# Altium PCB Main.PcbDoc
Units mm, origin at the board's own origin, x right, y up, seen from the top; angles counter-clockwise.
Board outline 39 x 21.9 mm, 2 copper layers (Top Layer, Bottom Layer); 45 components, 37 nets, 127 pads, 41 vias.
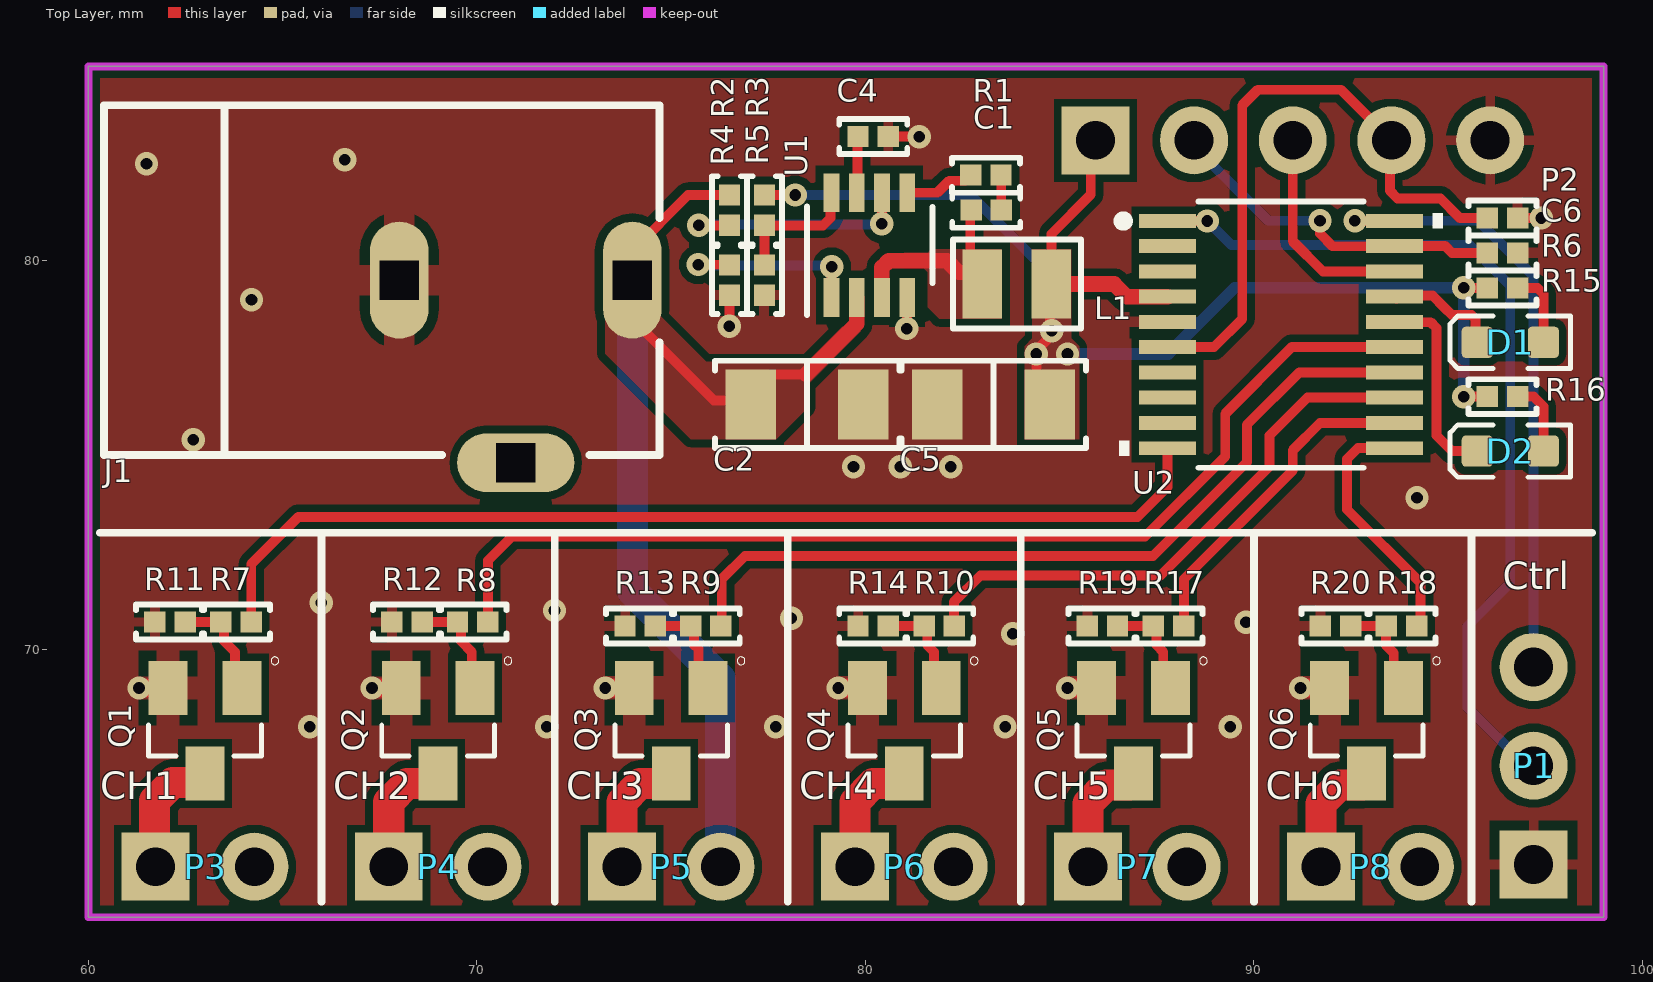
[diagram p0: Top Layer view]
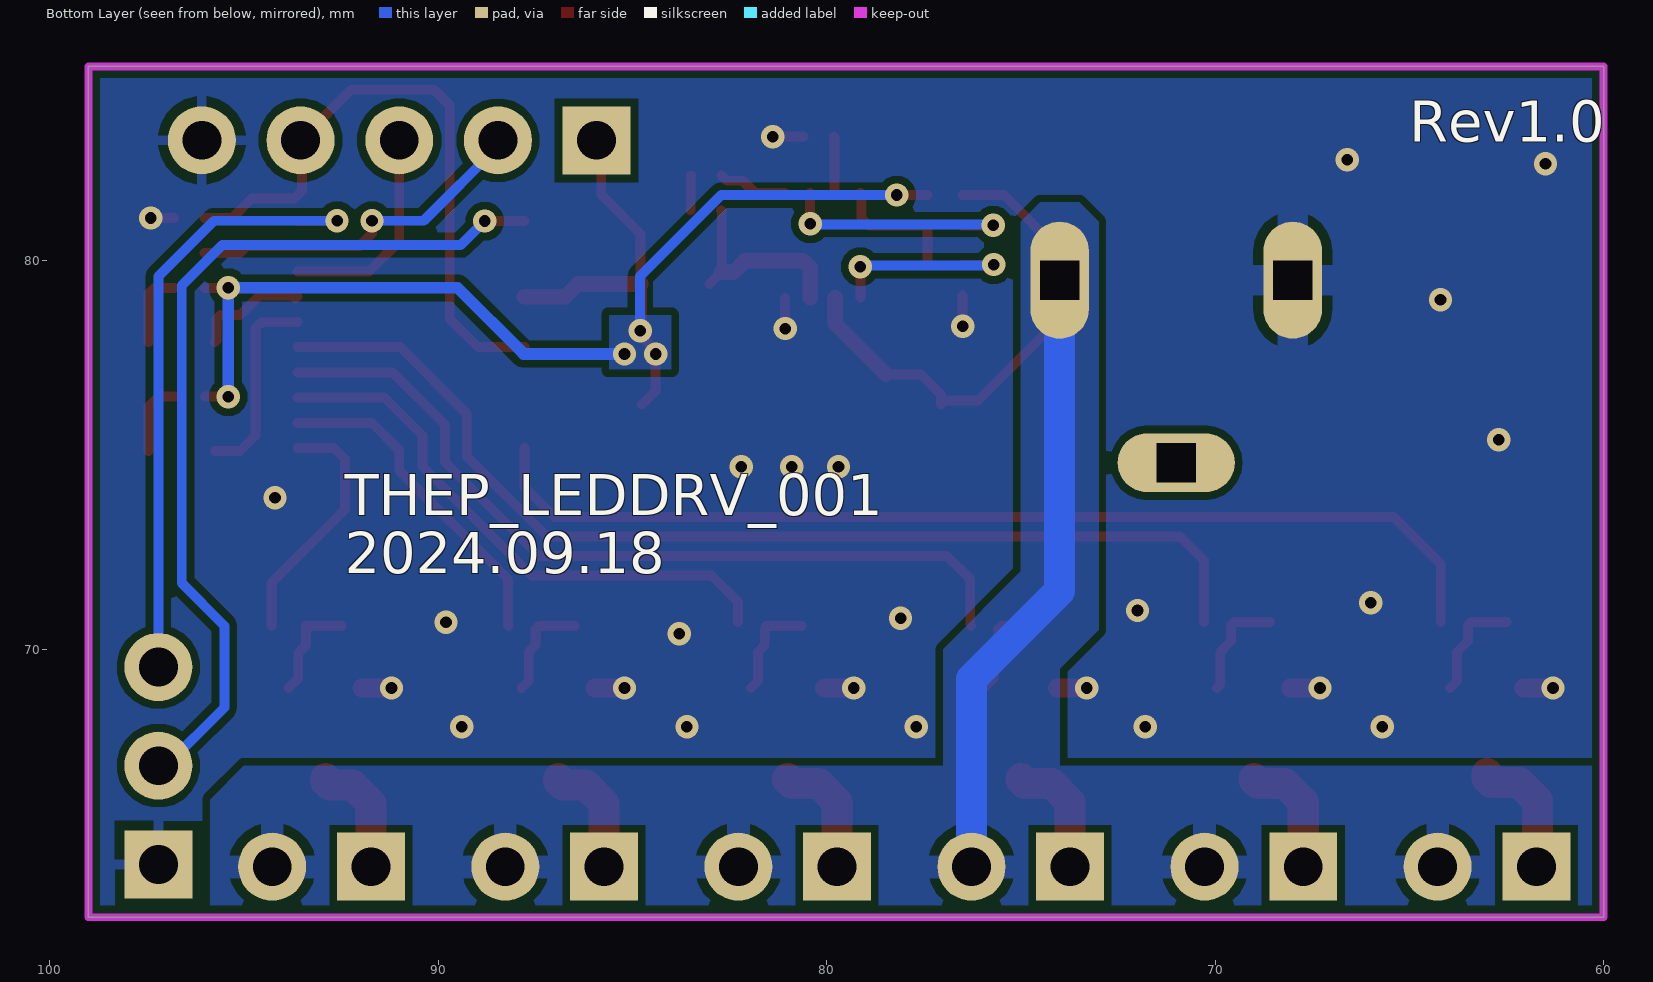
[diagram p1: Bottom Layer view, seen from below]

## Layer stack, top to bottom
Top Solder: solder mask 0.0102, Solder Resist, Dk 3.5
Top Layer: signal copper 0.0356
Dielectric 1: dielectric 0.32, FR-4, Dk 4.8
Bottom Layer: signal copper 0.0356
Bottom Solder: solder mask 0.0102, Solder Resist, Dk 3.5

## Board outline
60,63.1 60,85 99,85 99,63.1

## Design rules (kind name [scope] priority, off if disabled: settings)
Clearance [All] p1: gap=0.2 ignorepadtopadclearanceinfootprint=FALSE
HoleSize [All] p1: absolutevalues=TRUE maxlimit=4 minlimit=0.025 maxpercent=80.000 minpercent=20.000
HoleToHoleClearance [All] p1: gap=0 allowstackedmicrovias=TRUE
MinimumSolderMaskSliver [All] p1: minsoldermaskwidth=0
PolygonConnect [All] p1: connectstyle=Relief reliefconductorwidth=0.254 reliefentries=4 polygonreliefangle="90 Angle" airgapwidth=0.254
RoutingVias [All] p1: holewidth=0.3 width=0.6 viastyle="Through Hole" minholewidth=0.3 minwidth=0.6 maxholewidth=0.5 maxwidth=0.8
SilkToSilkClearance [All] p1 off: silktosilkclearance=0
SilkToSolderMaskClearance [IsPad] p1 off: minsilkscreentomaskgap=0 clearancetoexposedcopper=TRUE
SolderMaskExpansion [All] p1: expansion=0.102 istentingtop=FALSE
Width [All] p1: maxlimit=0.8 minlimit=0.254 preferedwidth=0.3
25 further rules are at their usual default settings.

## Classes and differential pairs
component class Main: C6 D1 D2 P1 P2 R6 R15 R16 U2
component class Power: C1 C2 C4 C5 J1 L1 R1 R2 R3 R4 R5 U1
component class Drivers: P3 P4 P5 P6 P7 P8 Q1 Q2 Q3 Q4 Q5 Q6 R7 R8 R9 R10 R11 R12 R13 R14 R17 R18 R19 R20

## Components (designator, comment, footprint, x,y, rotation, side; value= is the part's Value field where it differs from the comment)
C1 "0.1uF 25V" "CAP 0402_1005" 83.11,81.3 r0 top
C2 "22uF 25V" "CAP 1206_3216" 78.5,76.3 r180 top
C4 "0.1uF 25V" "CAP 0402_1005" 80.2,83.2 r180 top
C5 "22uF 25V" "CAP 1206_3216" 83.3,76.3 r0 top
C6 "0.1uF 25V" "CAP 0402_1005" 96.4,81.1 r180 top
D1 "BLU" LED-0603-BLUE 96.6,77.9 r180 top value=L0603G
D2 "BLU" LED-0603-BLUE 96.6,75.1 r180 top value=L0603G
J1 "PJ-102AH" CUI_PJ-102AH 74,79.5 r180 top
L1 "1uH" IND_SRN2012T_BRN 83.9,79.4 r0 top
P1 "3 Pin Header" "PCB - CONNECTOR - HEADER PIN 03" 97.2,67 r90 top
P2 "5 Pin Header" "PCB - CONNECTOR - HEADER PIN 05" 91,83.1 r0 top locked
P3 "2 Pin Header" "PCB - CONNECTOR - HEADER PIN 02" 63,64.4 r0 top
P4 "2 Pin Header" "PCB - CONNECTOR - HEADER PIN 02" 69,64.4 r0 top
P5 "2 Pin Header" "PCB - CONNECTOR - HEADER PIN 02" 75,64.4 r0 top
P6 "2 Pin Header" "PCB - CONNECTOR - HEADER PIN 02" 81,64.4 r0 top
P7 "2 Pin Header" "PCB - CONNECTOR - HEADER PIN 02" 87,64.4 r0 top
P8 "2 Pin Header" "PCB - CONNECTOR - HEADER PIN 02" 93,64.4 r0 top
Q1 "NDS355AN" SOT95P240X120-3N 63,67.9 r270 top
Q2 "NDS355AN" SOT95P240X120-3N 69,67.9 r270 top
Q3 "NDS355AN" SOT95P240X120-3N 75,67.9 r270 top
Q4 "NDS355AN" SOT95P240X120-3N 81,67.9 r270 top
Q5 "NDS355AN" SOT95P240X120-3N 86.9,67.9 r270 top
Q6 "NDS355AN" SOT95P240X120-3N 92.9,67.9 r270 top
R1 "20R" "RES 0402_1005" 83.1,82.2 r180 top
R2 "100k" "RES 0402_1005" 76.5,81.3 r90 top
R3 "20k" "RES 0402_1005" 77.4,81.3 r90 top
R4 "40.2k" "RES 0402_1005" 76.5,79.5 r90 top
R5 "6.34k" "RES 0402_1005" 77.4,79.5 r90 top
R6 "DNP" "RES 0402_1005" 96.4,80.2 r180 top
R7 "220R 5%" "RES 0402_1005" 63.8,70.7 r180 top
R8 "220R 5%" "RES 0402_1005" 69.89,70.7 r180 top
R9 "220R 5%" "RES 0402_1005" 75.89,70.6 r180 top
R10 "220R 5%" "RES 0402_1005" 81.9,70.6 r180 top
R11 "22k 5%" "RES 0402_1005" 62.1,70.7 r0 top
R12 "22k 5%" "RES 0402_1005" 68.2,70.7 r0 top
R13 "22k 5%" "RES 0402_1005" 74.2,70.6 r0 top
R14 "22k 5%" "RES 0402_1005" 80.2,70.6 r0 top
R15 "500R" "RES 0402_1005" 96.4,79.3 r0 top
R16 "500R" "RES 0402_1005" 96.4,76.5 r0 top
R17 "220R 5%" "RES 0402_1005" 87.8,70.6 r180 top
R18 "220R 5%" "RES 0402_1005" 93.8,70.6 r180 top
R19 "22k 5%" "RES 0402_1005" 86.1,70.6 r0 top
R20 "22k 5%" "RES 0402_1005" 92.1,70.6 r0 top
U1 "MP2318GJ-P" TSOT23-8_MP2318_MNP 80.1,80.4 r90 top
U2 "STM32G030F6P6" "STM32 - TSSOP20" 90.7,78.1 r0 top locked

## Footprints (in the part's own frame and the unit in brackets; to place one, negate y for a bottom-side part, rotate by r counter-clockwise, add the part's x,y. Pads: shape width x height; smd on the part's side, far side on the other; paste and mask are expansions set on the pad)
"CAP 0402_1005" [mm] "Chip Capacitor, 2-Leads, Body 1.02x0.51mm, IPC High Density"
  rect 0.55x0.54 smd: 1(-0.39,0) 2(0.39,0)
  silkscreen extent -0.87,-0.45 0.87,0.45, body extent -0.5,-0.26 0.5,0.26, height 0.52
"CAP 1206_3216" [mm] "Chip Capacitor, 2-Leads, Body 3.25x1.60mm, IPC Medium Density"
  rect 1.3x1.8 smd: 1(-1.45,0) 2(1.45,0)
  silkscreen extent -2.37,-1.12 2.37,1.12, body extent -1.6,-0.81 1.6,0.81, height 1.62
CUI_PJ-102AH [mm]
  oval 1.508x3.016 hole 1 square: 1(0,0) 2(6,0)
  oval 3.016x1.508 hole 1 square: 3(3,4.7)
  silkscreen extent -0.7,-4.5 13.6,4.5, body extent -0.8,-4.6 13.6,4.8, height 11.1
IND_SRN2012T_BRN [mil]
  rect 40x70 smd paste+0 mask+0: 1(-35,0) 2(35,0)
  silkscreen extent -65,-45 65,45, body extent -44,-28 44,28, height 47
LED-0603-BLUE [mm]
  round 0.254 on Mech15: 0(0,0)
  rrect25% 0.8x0.8 smd: A(-0.85,0) K(0.85,0)
  Top Layer pour cut-out: -0.5,0.5 0.5,0.5 0.5,-0.5 -0.5,-0.5
  silkscreen extent -1.55,-0.67 1.55,0.67, body extent -0.8,-0.4 0.8,0.4, height 0.75
"PCB - CONNECTOR - HEADER PIN 02" [mm]
  rect 1.75x1.75 hole 1: 1(-1.27,0)
  round 1.75 hole 1: 2(1.27,0)
"PCB - CONNECTOR - HEADER PIN 03" [mm]
  rect 1.75x1.75 hole 1: 1(-2.54,0)
  round 1.75 hole 1: 2(0,0) 3(2.54,0)
"PCB - CONNECTOR - HEADER PIN 05" [mm]
  rect 1.75x1.75 hole 1: 1(-5.08,0)
  round 1.75 hole 1: 2(-2.54,0) 3(0,0) 4(2.54,0) 5(5.08,0)
"RES 0402_1005" [mm] "Chip Resistor, 2-Leads, Body 1.0x0.5mm, IPC High Density"
  rect 0.55x0.54 smd: 1(-0.39,0) 2(0.39,0)
  silkscreen extent -0.87,-0.45 0.87,0.45, body extent -0.5,-0.25 0.5,0.25, height 0.35
SOT95P240X120-3N [mm]
  rect 1.4x1 smd: 1(-1.1,0.95) 2(-1.1,-0.95) 3(1.1,0)
  silkscreen extent -1.9,-1.45 0.65,1.9, body extent -1.25,-1.46 1.25,1.46, height 1.12
"STM32 - TSSOP20" [mm]
  rect 1.462x0.355 smd paste+0 mask+0: 1(-2.921,2.925) 2(-2.921,2.275) 3(-2.921,1.625) 4(-2.921,0.975) 5(-2.921,0.325) 6(-2.921,-0.325) 7(-2.921,-0.975) 8(-2.921,-1.625) 9(-2.921,-2.275) 10(-2.921,-2.925) 11(2.921,-2.925) 12(2.921,-2.275) 13(2.921,-1.625) 14(2.921,-0.975) 15(2.921,-0.325) 16(2.921,0.325) 17(2.921,0.975) 18(2.921,1.625) 19(2.921,2.275) 20(2.921,2.925)
  silkscreen extent -4.19,-3.43 4.16,3.43, body extent -3.3,-3.3 3.3,3.3, height 1.2
TSOT23-8_MP2318_MNP [mm]
  rect 0.998x0.406 smd paste+0 mask+0: 1(-1.35,0.975) 2(-1.35,0.325) 3(-1.35,-0.325) 4(-1.35,-0.975) 5(1.35,-0.975) 6(1.35,-0.325) 7(1.35,0.325) 8(1.35,0.975)
  silkscreen extent -1.8,-1.63 1,1.6, body extent -1.5,-1.5 1.5,1.5, height 0.99

## Part data
C1 C2 C4 C5 C6: library part Capacitor, "SMT Capacitor"
D1 D2: library part LED_BLUE, "CHIP LED BLUE", Manufacturer=Multicomp, Manufacturer Part Number="LG L29K-G2J1-24-Z", Part Number="LG L29K Smartled Green", Supplier part number=475-2709-1-ND, Artikkelnr Noca=N.A., Artikkelnr Simpro=N.A., Datasheet=http://www.osram-os.com/Graphics/XPic2/00077107_0.pdf, Footprint Doc=0603, LatestRevisionDate=2014-10-28, Note="2,24..5.6 mcd, Vfmin=1.7V", Pin Count=2, Published=2014-10-28, Publisher="Nordic Semiconductor", Supplier=Digi-Key
J1: "2.0 mm Center Pin, 5.0 A, Right Angle, Through Hole, Tapered Pins, Dc Power Jack Connector, Barrel Jack", Full Part Number=PJ-102AH
L1: library part "Inductor Core", "SMD Inductor with Core", Full Part Number=LQM2MPN1R0MGHL
Q1 Q2 Q3 Q4 Q5 Q6: "N-CHANNEL ENHANCEMENT MODE MOSFET", Full Part Number=NDS355AN
R1 R2 R3 R4 R5 R6 R7 R8 R9 R10 R11 R12 R13 R14 R15 R16 R17 R18 R19 R20: library part Resistor, "SMT Resistor"
U1: "No Description Available", Full Part Number=MP2318GJ, Mfr_Name="Monolithic Power Systems", RefDes=RefDes, Type=Type
U2: "No Description Available", Full Part Number=STM32G030F6P6

## Via types
v1: diameter 0.6, hole 0.3, Top Layer to Bottom Layer, tented both sides, 41 vias

## Nets (pads, with @x,y where several pads share a name; then routed paths per layer and width w, separated by ;. In a path a pad name is that pad's centre, name@x,y a point inside that pad or via, vN(x,y) a via of type N, cw(c..) or ccw(c..) an arc to the next point about the centre after c; other vN are vias at no path point)
3V3: C5.2 L1.2 P2.1 R3.2 R15.1 R16.1 U2.4 | length 35.3
  Top Layer w0.254: R3.2 v1(78.19,81.69) ; C5.2 84.4,76.65 84.4,77.694 84.75,78.044 84.75,79.361 L1.2 84.789,80.689 85.8,81.7 85.8,82.98 P2.1 ; v1(95.4,76.5) R16.1@96.005,76.5 ; v1(95.405,79.3) R15.1
  Top Layer w0.4: L1.2 86.4,79.4 86.725,79.075 U2.4
  Bottom Layer w0.254: v1(78.19,81.69) 82.71,81.69 84.8,79.6 v1(84.8,78.2) ; v1(95.4,76.5) v1@95.402,76.502 ; v1@95.402,79.297 v1(95.405,79.3)
  Bottom Layer w0.3: v1(85.2,77.6) 87.8,77.6 89.5,79.3 v1(95.405,79.3) ; v1@95.402,76.502 v1@95.402,79.297
  other v1: 84.4,77.6
12V: C2.2 J1.1 P3.2 P4.2 P5.2 P6.2 P7.2 P8.2 R2.2 U1.2 | length 29.3
  Top Layer w0.254: R2.2 75.436,81.69 74,80.254 J1.1 74,78.5 76.1,76.4 76.95,76.4 C2.2 77.05,76.55 77.573,77.073 78.473,77.073
  Top Layer w0.4: 78.473,77.073 79.772,78.372 79.772,79.047 U1.2
  Bottom Layer w0.8: J1.1 74,71.5 76.27,69.23 P5.2
GATE1: R7.1 U2.10 | length 26.9
  Top Layer w0.254: R7.1 64.19,72.19 65.4,73.4 87,73.4 87.779,74.179 U2.10
GATE2: R8.1 U2.15 | length 27.8
  Top Layer w0.254: R8.1 70.28,72.28 70.9,72.9 87.2,72.9 89.262,74.962 89.262,76.062 90.975,77.775 U2.15
GATE3: R9.1 U2.14 | length 21.3
  Top Layer w0.254: R9.1 76.3,70.62 76.3,71.8 76.9,72.4 87.4,72.4 89.821,74.821 89.821,75.779 91.167,77.125 U2.14
GATE4: R10.1 U2.13 | length 14.5
  Top Layer w0.254: R10.1@82.28,70.7 82.28,71.22 82.96,71.9 87.6,71.9 90.4,74.7 90.4,75.5 91.375,76.475 U2.13
GATE5: R17.1 U2.12 | length 8.6
  Top Layer w0.254: R17.1 88.202,70.612 88.202,71.802 91,74.6 91,75.119 91.706,75.825 U2.12
GATE6: R18.1 U2.11 | length 6.4
  Top Layer w0.254: U2.11 92.675,75.175 92.4,74.9 92.4,73.6 94.29,71.71 R18.1@94.29,70.6
GND: C2.1 C4.1 C5.1 C6.1 J1.2 P1.1 P2.5 Q1.2 Q2.2 Q3.2 Q4.2 Q5.2 Q6.2 R4.1 R5.1 R6.1 R11.1 R12.1 R13.1 R14.1 R19.1 R20.1 U1.4 U2.5 | length 7.5
  Top Layer w0.254: v1@76.498,78.318 R4.1@76.498,79.108 ; C4.1@80.592,83.198 v1@81.382,83.198 ; v1@81.072,78.258 U1.4@81.072,79.048 ; C6.1 v1(97.395,81.1)
  Top Layer w0.5: v1(61.3,69) Q1.2 ; v1(67.3,69) Q2.2 ; v1(73.3,69) Q3.2 ; v1(79.3,69) Q4.2 ; v1(85.2,69) Q5.2 ; v1(91.2,69) Q6.2
  other v1: 65.695,68 71.795,68 77.695,68 83.595,68 89.395,68 83.795,70.395 89.795,70.695 78.095,70.795 71.995,70.995 65.995,71.195 94.2,73.9 79.695,74.695 80.895,74.695 82.195,74.695 62.695,75.395 81.068,78.253 76.493,78.313 64.195,78.995 61.495,82.495 66.595,82.595 81.387,83.193
NetC1_1: C1.1 L1.1 U1.3 | length 5.3
  Top Layer w0.254: C1.1 82.7,81.28 82.7,79.711 82.711,79.7 L1.1
  Top Layer w0.4: U1.3 80.425,79.825 80.6,80 82.1,80 82.4,79.7 L1.1@82.711,79.7
NetC1_2: C1.2 R1.1 | length 0.9
  Top Layer w0.254: R1.1 83.495,82.195 83.495,81.305 C1.2
NetC4_2: C4.2 U1.7 | length 1.5
  Top Layer w0.254: U1.7 79.792,81.767 79.792,83.183 C4.2
NetD1_A: D1.A R15.2 | length 2
  Top Layer w0.254: R15.2 97.3,79.3 97.45,79.15 D1.A
NetD1_K: D1.K U2.17 | length 3
  Top Layer w0.254: U2.17@93.671,79.025 U2.17 93.646,79.1 94.6,79.1 94.9,78.8 95.1,78.6 95.6,78.6 95.7,78.5 95.7,77.95 D1.K
NetD2_A: D2.A R16.2 | length 1.9
  Top Layer w0.254: R16.2 97.2,76.5 97.45,76.25 D2.A
NetD2_K: D2.K U2.16 | length 5.1
  Top Layer w0.254: U2.16 93.63,78.416 94.551,78.416 94.7,78.267 94.7,75.5 95.1,75.1 D2.K
NetP3_1: P3.1 Q1.3 | length 3.4
  Top Layer w0.8: P3.1 61.7,64.43 61.7,66.1 62.169,66.569 62.9,66.569 63,66.669 Q1.3
NetP4_1: P4.1 Q2.3 | length 3.2
  Top Layer w0.8: P4.1 67.73,66.07 68.199,66.539 68.9,66.539 69,66.639 Q2.3@69,66.669
NetP5_1: P5.1 Q3.3 | length 3.2
  Top Layer w0.8: P5.1 73.73,66.07 74.199,66.539 74.9,66.539 75,66.639 Q3.3@75,66.669
NetP6_1: P6.1 Q4.3 | length 3.2
  Top Layer w0.8: P6.1 79.73,66.07 80.199,66.539 80.9,66.539 81,66.639 Q4.3@81,66.669
NetP7_1: P7.1 Q5.3 | length 3.1
  Top Layer w0.8: P7.1 85.73,66.031 86.199,66.5 86.8,66.5 86.9,66.6 Q5.3@86.9,66.669
NetP8_1: P8.1 Q6.3 | length 3.1
  Top Layer w0.8: P8.1 91.73,66.031 92.199,66.5 92.8,66.5 92.9,66.6 Q6.3@92.9,66.669
NetQ1_1: Q1.1 R7.2 R11.2 | length 2.8
  Top Layer w0.254: R11.2 R7.2 63.493,70.617 63.493,70.207 63.768,69.932 63.768,69.182 Q1.1
NetQ2_1: Q2.1 R8.2 R12.2 | length 2.8
  Top Layer w0.254: R12.2 R8.2 69.588,70.612 69.588,70.212 69.868,69.932 69.868,69.082 Q2.1
NetQ3_1: Q3.1 R9.2 R13.2 | length 2.7
  Top Layer w0.254: R13.2 R9.2 75.588,70.512 75.588,70.112 75.7,70 75.7,69.25 Q3.1
NetQ4_1: Q4.1 R10.2 R14.2 | length 2.6
  Top Layer w0.254: R14.2@80.645,70.6 R10.2@81.555,70.6 ; R10.2@81.55,70.55 81.593,70.507 81.593,70.107 81.768,69.932 81.768,69.182 Q4.1
NetQ5_1: Q5.1 R17.2 R19.2 | length 2.7
  Top Layer w0.254: R19.2 R17.2 87.493,70.517 87.493,70.107 87.668,69.932 87.668,69.182 Q5.1
NetQ6_1: Q6.1 R18.2 R20.2 | length 2.7
  Top Layer w0.254: R20.2 R18.2 93.4,70.59 93.4,70.1 93.6,69.9 93.6,69.25 Q6.1
NetR1_2: R1.2 U1.5 | length 1.8
  Top Layer w0.254: U1.5 81.85,81.75 82.157,82.057 82.567,82.057 R1.2
NetR2_1: R2.1 U1.6 | length 6.3
  Top Layer w0.254: v1(75.71,80.91) R2.1 ; v1@80.423,80.957 U1.6@80.423,81.747
  Bottom Layer w0.254: v1(75.71,80.91) 75.731,80.931 80.396,80.931 v1(80.418,80.952)
NetR3_1: R3.1 R5.2 U1.8 | length 3.5
  Top Layer w0.254: R5.2 R3.1 78.91,80.91 79.1,81.1 79.1,81.725 U1.8
NetR4_2: R4.2 U1.1 | length 5
  Top Layer w0.254: v1(75.7,79.9) 75.705,79.895 76.495,79.895 R4.2 ; U1.1 v1@79.125,79.84
  Bottom Layer w0.254: v1(75.7,79.9) 75.727,79.873 79.103,79.873 v1(79.13,79.845)
NRST: C6.2 P2.4 U2.6 | length 16.4
  Top Layer w0.254: U2.6 88.975,77.775 89.7,78.5 89.7,84 90.1,84.4 92.24,84.4 P2.4 93.5,83.06 93.5,81.8 93.7,81.6 94.8,81.6 95.3,81.1 C6.2
SWCLK: P2.2 R6.2 U2.19 | length 9.3
  Top Layer w0.254: P2.2 P2.2@88.46,83.26 ; v1@91.766,80.934 91.7,81 91.7,80.7 92.027,80.373 93.619,80.373 U2.19 94.925,80.375 95.1,80.2 R6.2
  Bottom Layer w0.254: P2.2 88.46,82.94 90.37,81.03 v1(91.7,81.03)
SWDIO: P2.3 U2.18 | length 5.5
  Top Layer w0.254: P2.3 91,80.5 91.775,79.725 U2.18
USART1_RX: P1.2 U2.1 | length 22.9
  Top Layer w0.254: U2.1 v1@88.8,81.025
  Bottom Layer w0.254: v1(88.8,81.02) 89.417,80.403 95.555,80.403 96.6,79.358 96.6,71.7 95.5,70.6 95.5,68.5 P1.2@97,67
USART1_TX: P1.3 U2.20 | length 16.3
  Top Layer w0.254: v1@92.6,81.025 U2.20
  Bottom Layer w0.254: v1(92.6,81.03) 95.77,81.03 97.2,79.6 P1.3
pads on no net: D1.0 D2.0 J1.3 U2.2 U2.3 U2.7 U2.8 U2.9

## Polygon pours and split planes (outlines as drawn)
GND on Top Layer "NONET_L01_P-001" (solid, pour order 16): 60,85 99,85 99,63.1 60,63.1
3V3 on Top Layer "NONET_L01_P-001" (solid, pour order 14): 84.1,75.4 84.1,77.8 84.3,78 84.3,80.3 85.3,80.3 85.3,78 85.5,77.8 85.5,75.4
NetC1_1 on Top Layer "NONET_L01_P-001" (solid, pour order 13): 81,79.8 81.5,79.8 81.6,79.7 81.6,78.8 81.9,78.5 83.5,78.5 83.5,80.3 81.7,80.3 81.6,80.2 81,80.2
12V on Top Layer "NONET_L01_P-001" (solid, pour order 15): 73.3,77.6 75.5,75.4 77.7,75.4 78.5,76.2 78.5,76.8 80,78.3 80,79.6 79.6,79.6 79.6,78.5 78.5,77.4 75.9,77.4 74.7,78.6 74.7,80.4 73.3,80.4
GND on Bottom Layer "NONET_L01_P-001" (solid, pour order 20): 60,85 99,85 99,63.1 60,63.1
12V on Bottom Layer "NONET_L01_P-001" (solid, pour order 18): 73,81 73,70.5 74,69.5 74,66.5 77,66.5 77,70 75,72 75,81 74.5,81.5 73.5,81.5 73,81
12V on Bottom Layer "NONET_L01_P-001" (solid, pour order 19): 60,63.1 60,67 95,67 95.871,66.129 95.871,63.1
3V3 on Bottom Layer "NONET_L01_P-001" (solid, pour order 17): 84,78.6 84,77.2 85.6,77.2 85.6,78.6

## Keep-outs
Keep-Out Layer:
  the board outline again, w0.2

## Silkscreen, mask and mechanical layers (free items; w line width, h text height)
Top Overlay:
  lines w0.2: 60.3,73 66,73 ; 66,63.5 66,73 ; 72,63.5 72,73 ; 78,63.5 78,73 ; 84,63.5 84,73 ; 90,63.5 90,73 ; 95.6,63.5 95.6,73 ; 98.7,73 95.6,73 ; 66,73 72,73 ; 72,73 78,73 ; 78,73 84,73 ; 84,73 90,73 ; 90,73 95.6,73
  text "Ctrl" at 96.401,71.307 h1.2
  text "CH1" at 60.301,65.907 h1.2
  text "CH2" at 66.301,65.907 h1.2
  text "CH3" at 72.301,65.907 h1.2
  text "CH4" at 78.301,65.907 h1.2
  text "CH5" at 84.301,65.907 h1.2
  text "CH6" at 90.301,65.907 h1.2
Bottom Overlay:
  text "Rev1.0" at 65,82.71 h1.8
  text "THEP_LEDDRV_001" at 92.401,73.097 h1.8
  text "2024.09.18" at 92.4,71.61 h1.8
Outline:
  lines w0: 60,63.1 98,63.1 99,63.1 99,85 98,85 60,85 60,72 60,64.6 60,63.1